# Altium PCB Infrared Emission.PcbDoc
Units mil, origin at the board's own origin, x right, y up, seen from the top; angles counter-clockwise.
Board outline 1965 x 2030 mil, 2 copper layers (Top Layer, Bottom Layer); 13 components, 10 nets, 37 pads, 0 vias.
Unrouted connection lines stored in the file: 4.
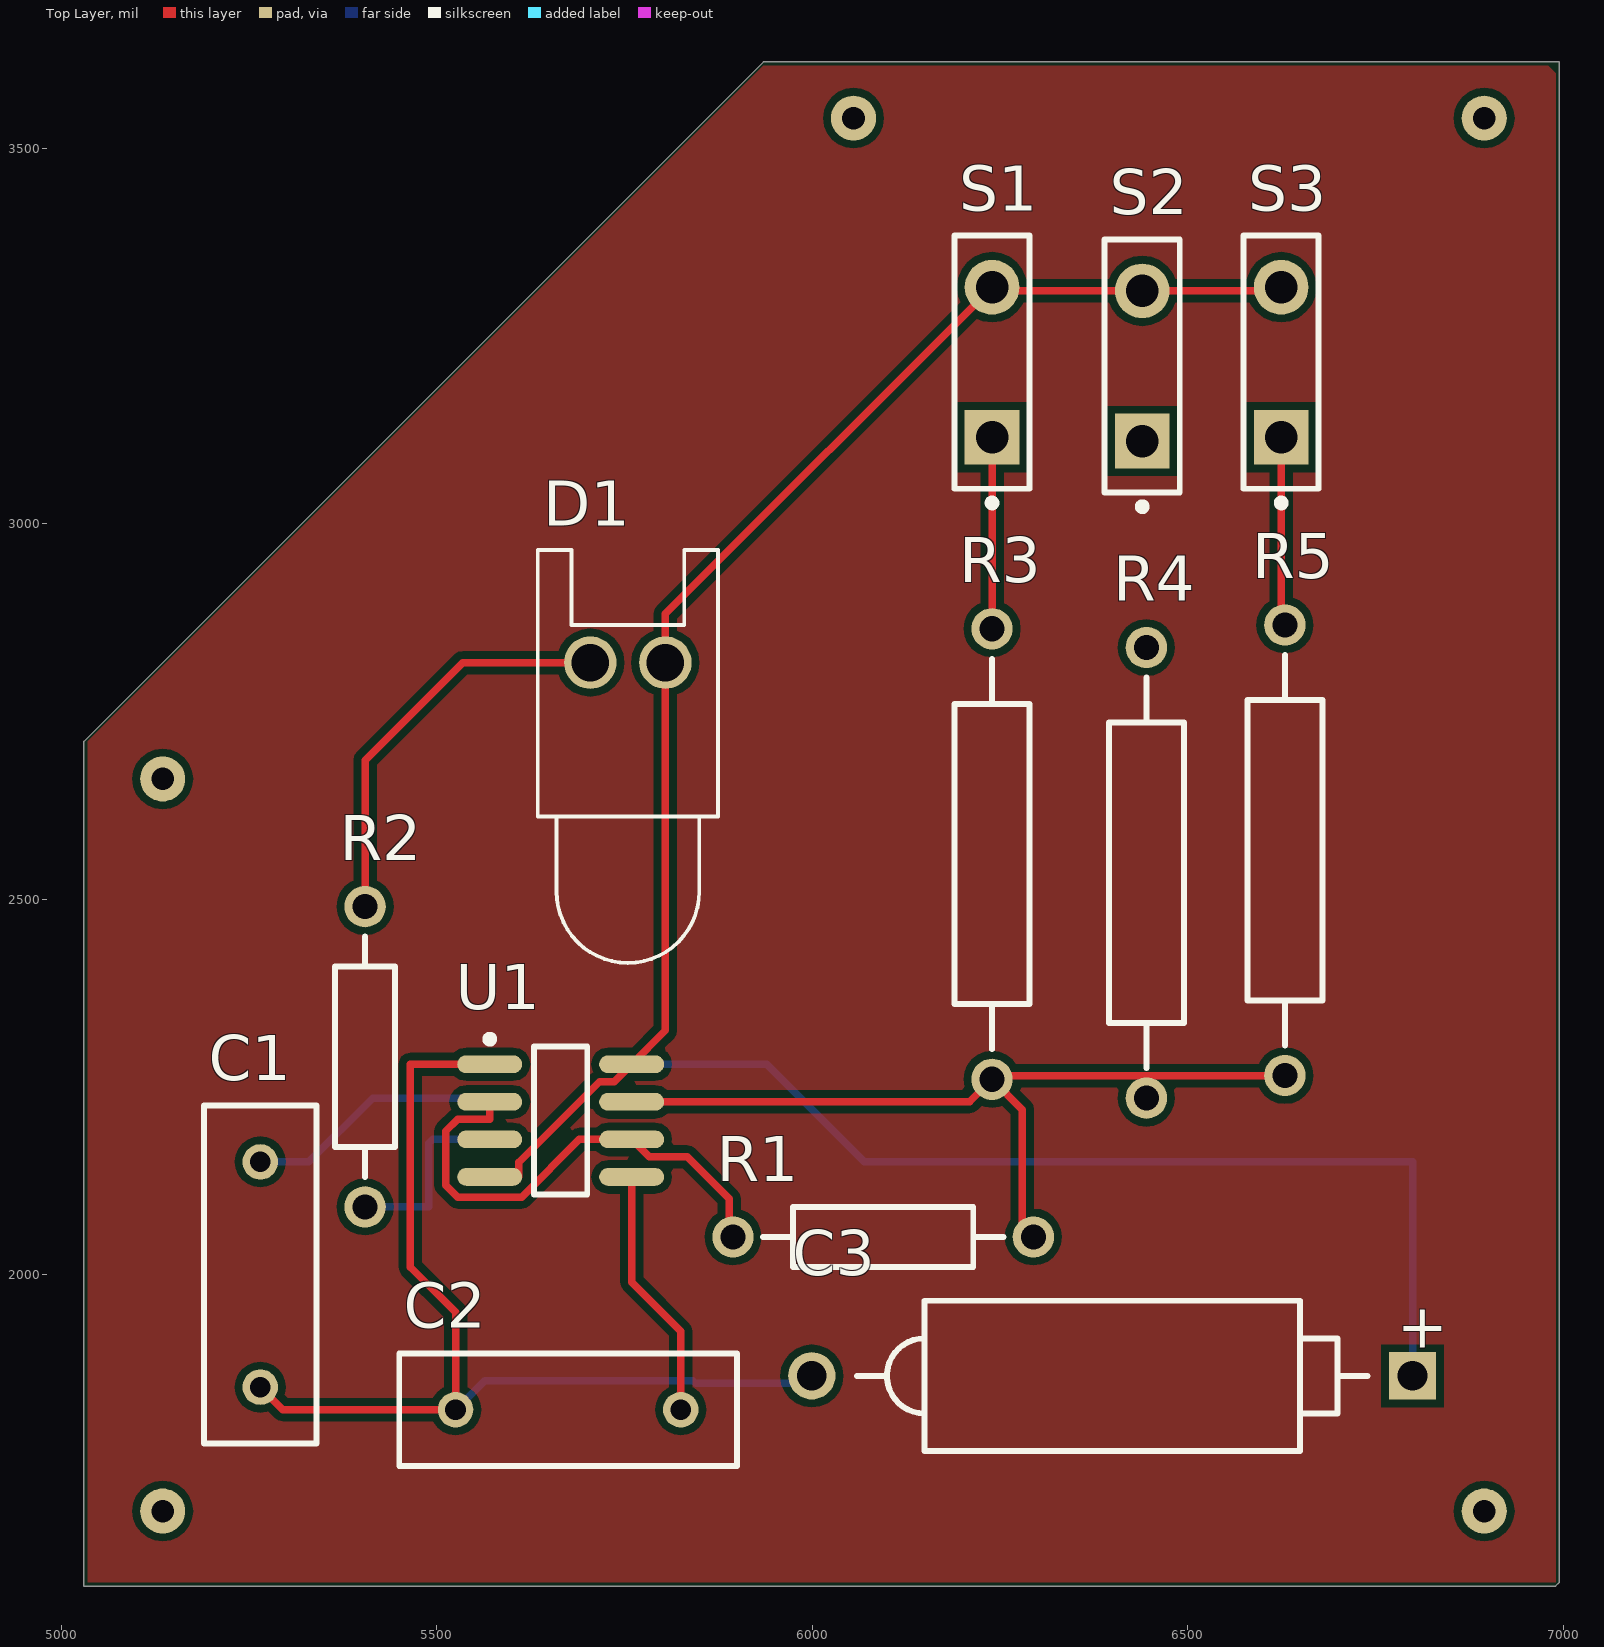
[diagram p0: Top Layer view]
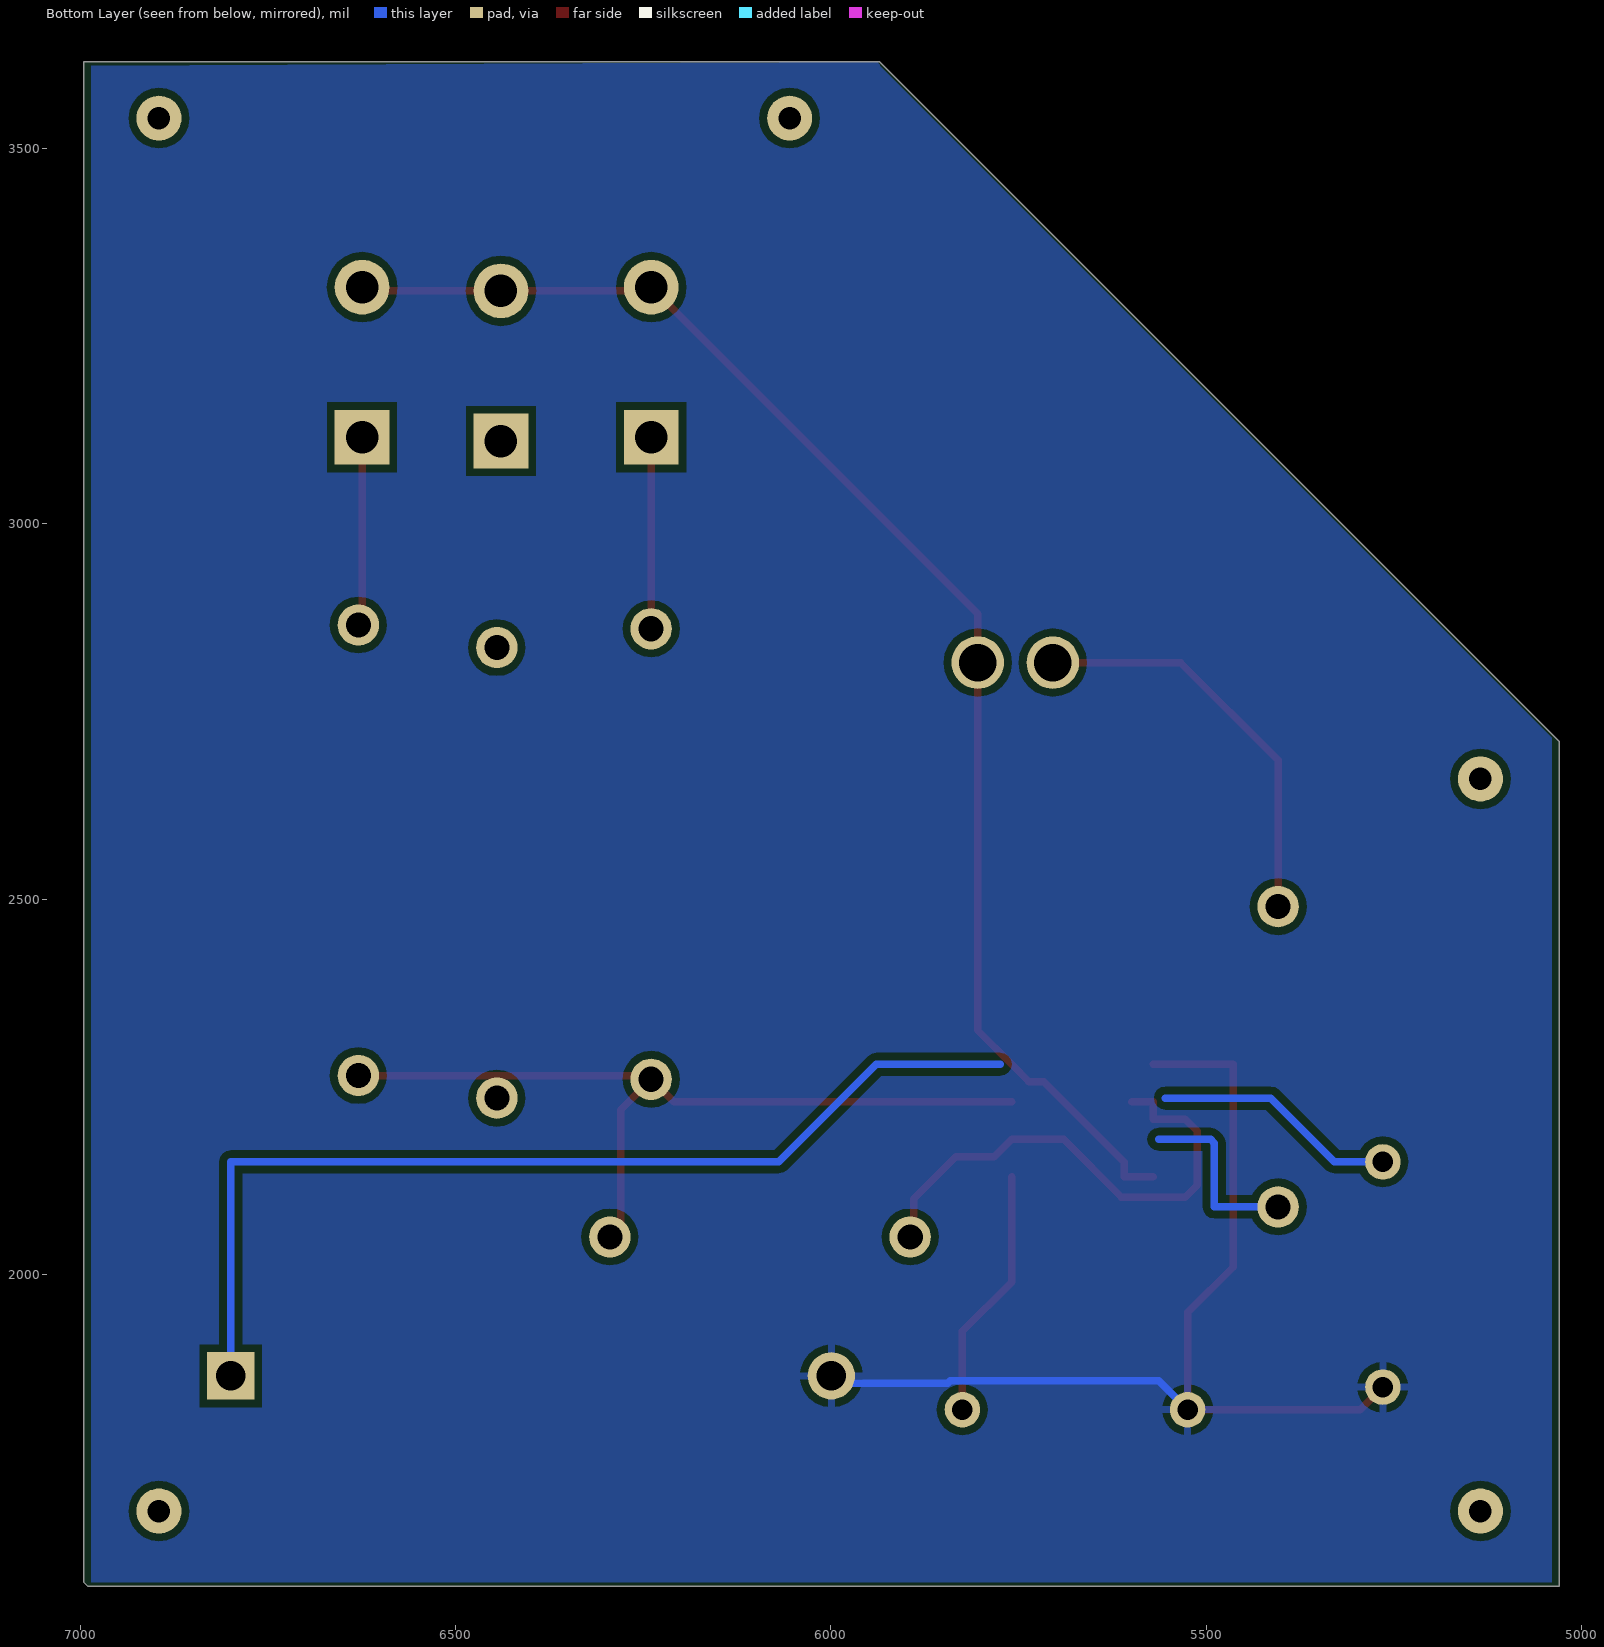
[diagram p1: Bottom Layer view, seen from below]

## Layer stack, top to bottom
Top Solder: solder mask 0.4, Solder Resist, Dk 3.5
Top Layer: signal copper 1.4
Dielectric 1: dielectric 12.6, FR-4, Dk 4.8
Bottom Layer: signal copper 1.4
Bottom Solder: solder mask 0.4, Solder Resist, Dk 3.5

## Board outline
5030,1585 5030,2710 5935,3615 6995,3615 6995,1590 6990,1585

## Design rules (kind name [scope] priority, off if disabled: settings)
Clearance [All] p1: gap=10 ignorepadtopadclearanceinfootprint=FALSE except(0: Arc-Hole Track-Hole SMDPad-Hole THPad-Hole Via-Hole Fill-Hole Poly-Hole Region-Hole Text-Hole)
PolygonConnect [All] p1: connectstyle=Relief reliefconductorwidth=10 reliefentries=4 polygonreliefangle="90 Angle" airgapwidth=10
RoutingVias [All] p1: holewidth=28 width=50 viastyle="Through Hole" minholewidth=28 minwidth=50 maxholewidth=28 maxwidth=50
SolderMaskExpansion [All] p1: expansion=4
Width [All] p1: maxlimit=10 minlimit=10 preferedwidth=10
30 further rules are at their usual default settings.

## Components (designator, comment, footprint, x,y, rotation, side; value= is the part's Value field where it differs from the comment)
C1 "Cap" RAD-0.3 5265,2000 r270 top value=100pF
C2 "Cap" RAD-0.3 5675,1820 r180 top value=100pF
C3 "Cap Pol2" POLAR0.8 6399.49,1865 r0 top value=100pF
D1 "LED0" LED-0 5754.49,2815 r0 top
R1 "Res2" AXIAL-0.4 6094.49,2050 r0 top value=1K
R2 "Res2" AXIAL-0.4 5404.49,2290 r90 top value=1K
R3 "Res Adj2" AXIAL-0.6 6239.49,2560 r90 top value=1K
R4 "Res Adj2" AXIAL-0.6 6445,2535 r90 top value=1K
R5 "Res Adj2" AXIAL-0.6 6629.49,2565 r90 top value=1K
S1 "SW-PB" SPST-2 6239.49,3215 r90 top
S2 "SW-PB" SPST-2 6439.49,3210 r90 top
S3 "SW-PB" SPST-2 6624.49,3215 r90 top
U1 "NE555D" D008_N 5665,2205 r0 top

## Footprints (in the part's own frame and the unit in brackets; to place one, negate y for a bottom-side part, rotate by r counter-clockwise, add the part's x,y. Pads: shape width x height; smd on the part's side, far side on the other; paste and mask are expansions set on the pad)
AXIAL-0.4 [mm] "Axial Device, Thru-Hole; 2 Leads; 0.4 in Pin Spacing"
  round 1.4 hole 0.85: 1(-5.08,0) 2(5.08,0)
  silkscreen extent -4.06,-1.02 4.06,1.02
AXIAL-0.6 [mm] "Axial Device, Thru-Hole; 2 Leads; 0.6 in Pin Spacing"
  round 1.4 hole 0.85: 1(-7.62,0) 2(7.62,0)
  silkscreen extent -6.6,-1.27 6.6,1.27
D008_N [mm] "SOIC, 8-Leads, Body 4.9x3.9mm, Pitch 1.27mm, IPC Medium Density"
  oval 2.2x0.6 smd: 1(-2.4,1.905) 2(-2.4,0.635) 3(-2.4,-0.635) 4(-2.4,-1.905) 5(2.4,-1.905) 6(2.4,-0.635) 7(2.4,0.635) 8(2.4,1.905)
  silkscreen extent -2.52,-2.5 0.9,2.88, body extent -1.95,-2.45 1.95,2.45, height 1.75
LED-0 [mil] "LED; 2 Leads"
  round 70 hole 50: 1(50,0) 2(-50,0)
  silkscreen extent -120,-400 120,150
POLAR0.8 [mm] "Polarized Capacitor; 2 Leads"
  rect 1.6x1.6 hole 1: 1(10.16,0)
  round 1.6 hole 1: 2(-10.16,0)
  silkscreen extent -8.64,-2.54 8.64,2.54
RAD-0.3 [mm] "Radial Cap, Thru-Hole; 2 Leads; 0.3 in Pin Spacing"
  round 1.2 hole 0.7: 1(-3.81,0) 2(3.81,0)
  silkscreen extent -5.71,-1.91 5.71,1.91
SPST-2 [mm] "Switch; 2 Leads"
  rect 1.85x1.85 hole 1.1: 1(-2.54,0)
  round 1.85 hole 1.1: 2(2.54,0)
  silkscreen extent -4.89,-1.27 4.28,1.27

## Part data
C1 C2: "Capacitor", LatestRevisionDate=17-Jul-2002, LatestRevisionNote="Re-released for DXP Platform.", PackageDescription="Radial Cap, Thru-Hole; 2 Leads; 0.3 in Pin Spacing", PackageReference=RAD-0.3, Published=8-Jun-2000, Publisher="Altium Limited"
C3: "Polarized Capacitor (Axial)", LatestRevisionDate=17-Jul-2002, LatestRevisionNote="Re-released for DXP Platform.", PackageDescription="Polarized Capacitor; 2 Leads", PackageReference=POLAR0.8, Published=8-Jun-2000, Publisher="Altium Limited"
D1: "Typical INFRARED GaAs LED", LatestRevisionDate=08-Jul-2005, LatestRevisionNote="Mech Layer 1 removed.", PackageDescription="LED; 2 Leads", PackageReference=LED-0, Published=8-Jun-2000, Publisher="Altium Limited"
R1 R2: "Resistor", LatestRevisionDate=17-Jul-2002, LatestRevisionNote="Re-released for DXP Platform.", PackageDescription="Axial Device, Thru-Hole; 2 Leads; 0.4 in Pin Spacing", PackageReference=AXIAL-0.4, Published=8-Jun-2000, Publisher="Altium Limited"
R3 R4 R5: "Variable Resistor", LatestRevisionDate=17-Jul-2002, LatestRevisionNote="Re-released for DXP Platform.", PackageDescription="Axial Device, Thru-Hole; 2 Leads; 0.6 in Pin Spacing", PackageReference=AXIAL-0.6, Published=8-Jun-2000, Publisher="Altium Limited", Set Position=0.5
S1 S2 S3: "Switch", LatestRevisionDate=17-Jul-2002, LatestRevisionNote="Re-released for DXP Platform.", PackageDescription="Switch; 2 Leads", PackageReference=SPST-2, Published=24-Mar-1999, Publisher="Altium Limited"
U1: "Precision Timer", Code_IPC=SOIC127P600-8, ComponentLink1Description="Manufacturer Link", ComponentLink1URL=http://www.ti.com/, ComponentLink2Description=Datasheet, ComponentLink2URL=http://www-s.ti.com/sc/ds/ne555.pdf, DatasheetVersion=Feb-1992, LatestRevisionDate=13-Apr-2006, LatestRevisionNote="IPC-7351 Footprint Added.", PackageDescription="8-Pin Small Outline Integrated Circuit 1.27 mm Pitch", PackageReference=D008, PackageVersion=Jan-1998, Published=16-Jan-2001, Publisher="Altium Limited"

## Free pads (board coordinates)
  round 60 hole 30: 2(6895,1685) 3(5135,1685) 4(5135,2660) 5(6895,3540) 6(6055,3540)

## Nets (pads, with @x,y where several pads share a name; then routed paths per layer and width w, separated by ;. In a path a pad name is that pad's centre, name@x,y a point inside that pad or via, vN(x,y) a via of type N, cw(c..) or ccw(c..) an arc to the next point about the centre after c; other vN are vias at no path point)
GND: C1.2 C2.2 C3.2 U1.1 | length 1355.5
  Top Layer w10: C1.2 5295,1820 C2.2 5525,1949.49 5464.49,2010 5464.49,2280 U1.1
  Bottom Layer w10: C2.2 5563.62,1858.62 5841,1858.62 5844.62,1855 C3.2@5999.49,1855
NetC1_1: C1.1 R1.1 U1.2 U1.6 | length 1018.2
  Top Layer w10: U1.2@5599.49,2230 U1.2 5570.51,2206.81 5527.91,2206.81 5512.2,2191.11 5512.2,2118.89 5527.91,2103.19 5613.11,2103.19 5689.92,2180 U1.6 5782.68,2156.81 5833.72,2156.81 5889.49,2101.05 5889.49,2050 R1.1
  Bottom Layer w10: C1.1 5329.49,2150 5414.49,2235 5554.49,2235
NetC2_1: C2.1 U1.5 | length 337.1
  Top Layer w10: U1.5 5759.49,1990 5825,1924.49 C2.1
NetD1_2: D1.2 R2.2 | length 548.8
  Top Layer w10: R2.2 5404.49,2685 5534.49,2815 D1.2
NetR1_2: R1.2 R3.1 R4.1 R5.1 U1.7 | length 1106.3
  Top Layer w10: U1.7 6209.49,2230 R3.1 ; R1.2@6280,2055 6280,2219.49 R3.1 ; R5.1 6244.49,2265 R3.1
NetR2_1: R2.1 U1.3 | length 246.2
  Bottom Layer w10: R2.1 5489.49,2090 5489.49,2175 5494.49,2180 5563.62,2180
NetR3_2: R3.2 S1.1 | length 255
  Top Layer w10: R3.2 S1.1
NetR4_2: R4.2 S2.1
NetR5_2: R5.2 S3.1 | length 252.1
  Top Layer w10: S3.1 6624.49,2870 R5.2
VCC: C3.1 D1.1 S1.2 S2.2 S3.2 U1.4 U1.8 | length 3259.4
  Top Layer w10: U1.4 5609.49,2130 5609.49,2149.56 5716.74,2256.81 5736.3,2256.81 U1.8 5804.49,2325 D1.1 5804.49,2880 S1.2 6244.49,3310 S2.2 6619.49,3310 S3.2
  Bottom Layer w10: 5774.49,2280 5939.49,2280 6069.49,2150 6799.49,2150 C3.1@6799.49,1855

## Polygon pours and split planes (outlines as drawn)
GND on Bottom Layer "GND_L02_P004" (solid, remove dead copper, pour order 4): 5935,3615 5935,3610 5040,2715 5040,1590 6985,1590 6985,3610
no net on Bottom Layer "NONET_L02_P002" (hatched Horizontal grid 20 track 8, remove dead copper, pour order 2): 5935,3615
no net on Top Layer "NONET_L01_P000" (solid, pour order 0): 5935,3610 5035,2710 5035,1590 6990,1590 6990,3600 6980,3610

## Silkscreen, mask and mechanical layers (free items; w line width, h text height)
Drill Drawing:
  the board outline again, w10

## Dimensions
5040,1565 to 6985,1565 on Mechanical 1
6994.01,3610.06 to 7009.01,1610.06 on Mechanical 1

## Text inside footprints (layer, text, board x,y; h text height)
C3: Top Overlay "+" at 6779.49,1902.4 h59.06